# Altium PCB CPU.PcbDoc (part 1 of 2)
Units mm, origin at the board's own origin, x right, y up, seen from the top; angles counter-clockwise.
Board outline 46.9 x 22.5 mm, 2 copper layers (Top Layer, Bottom Layer), stack 0.904 mm thick; 53 components, 92 nets, 333 pads, 142 vias.
Unrouted connection lines stored in the file: 2.
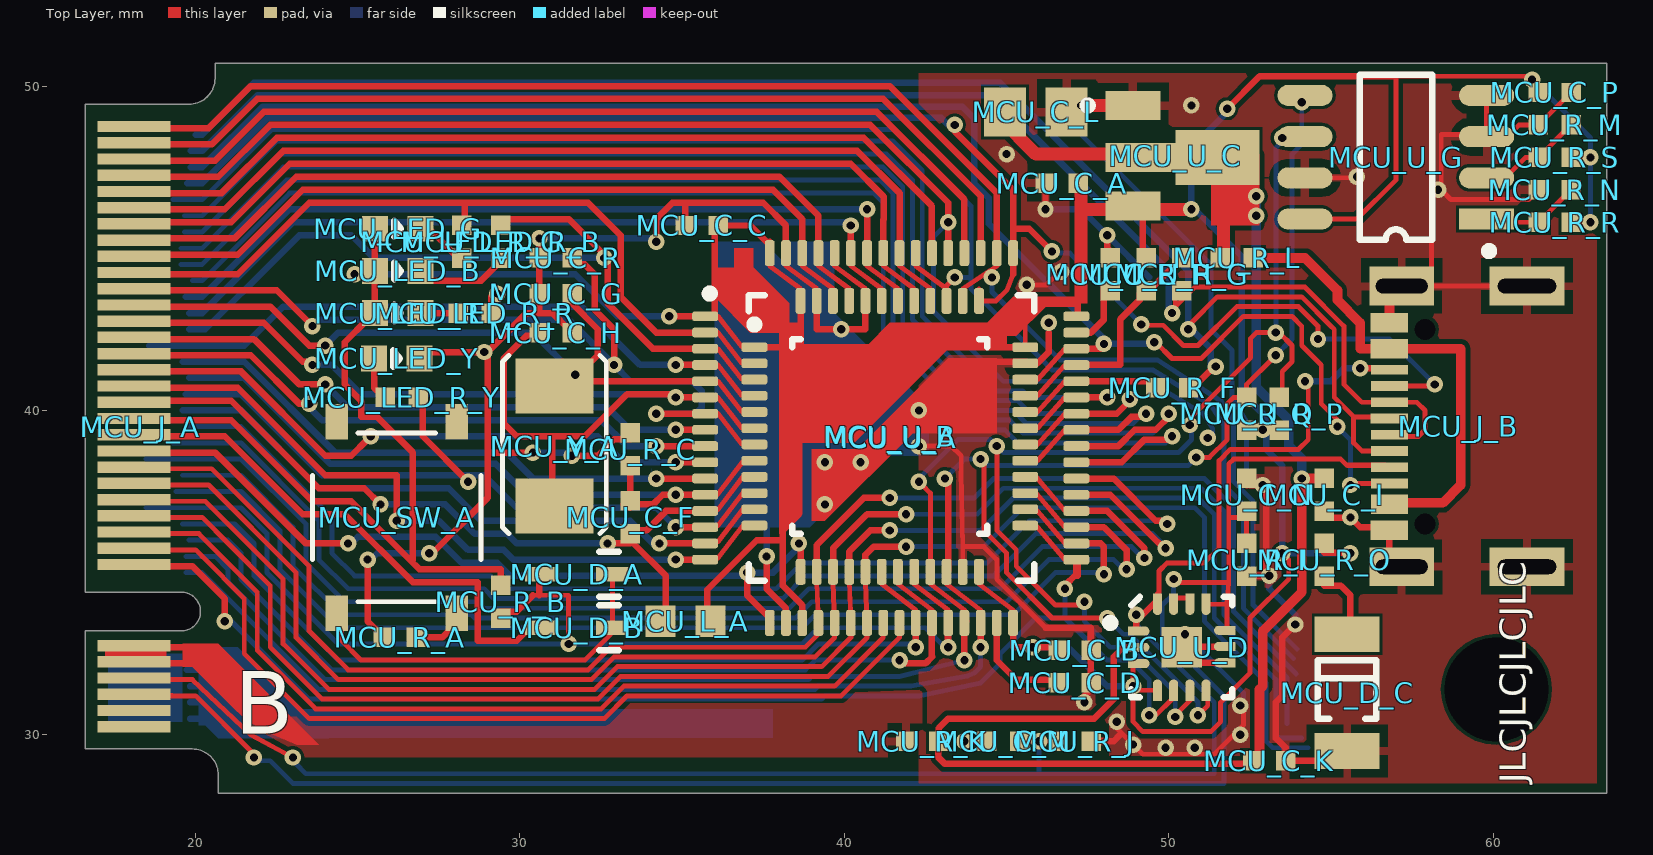
[diagram p0: Top Layer view]
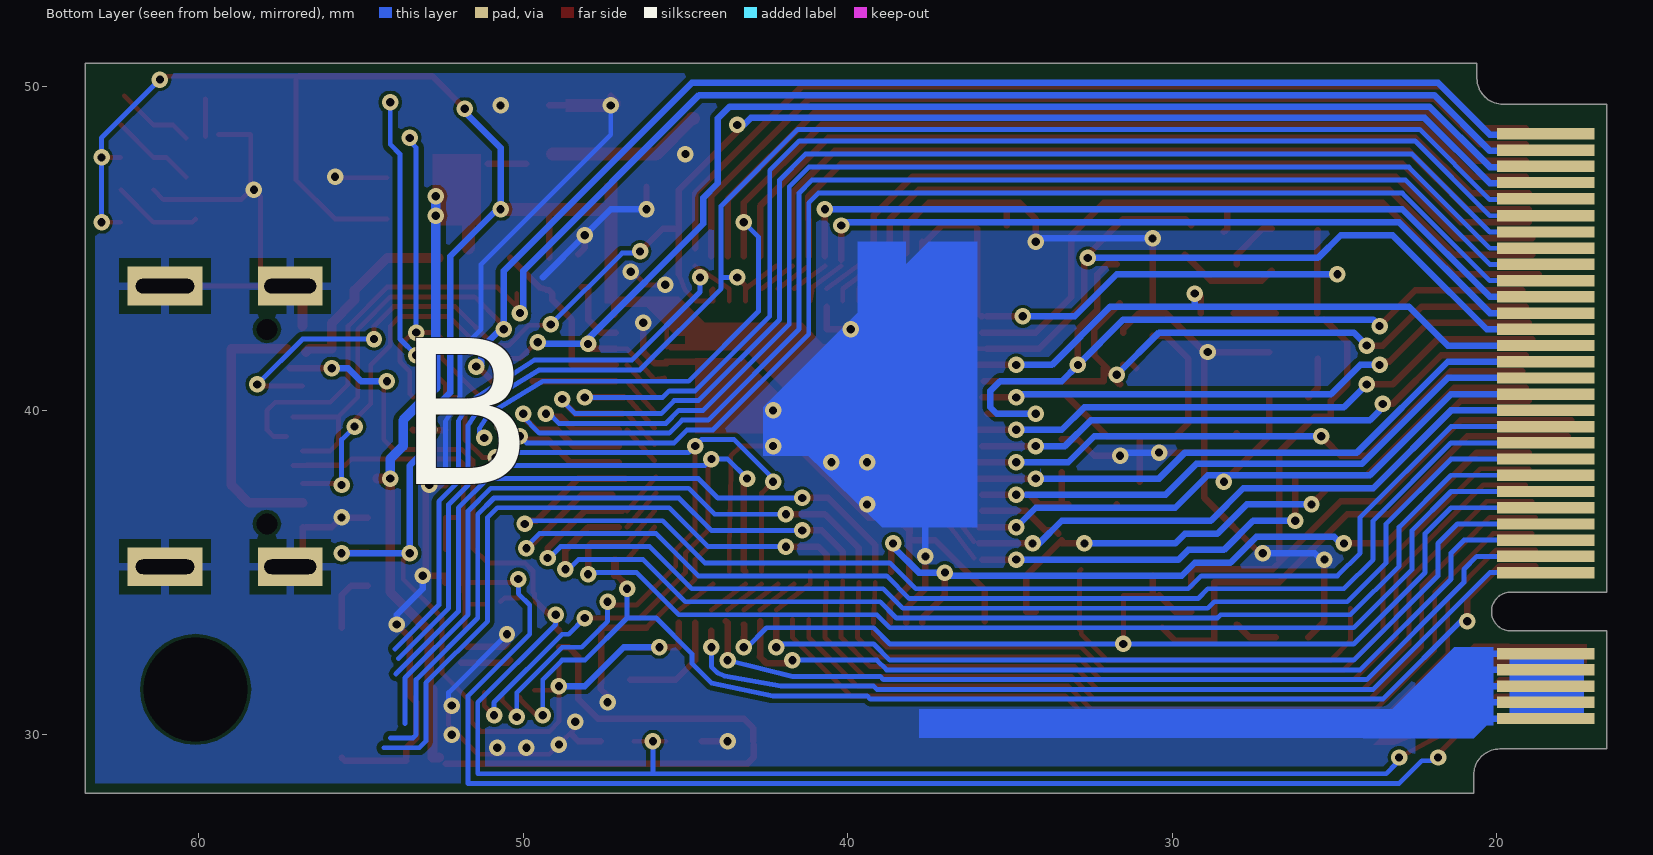
[diagram p1: Bottom Layer view, seen from below]
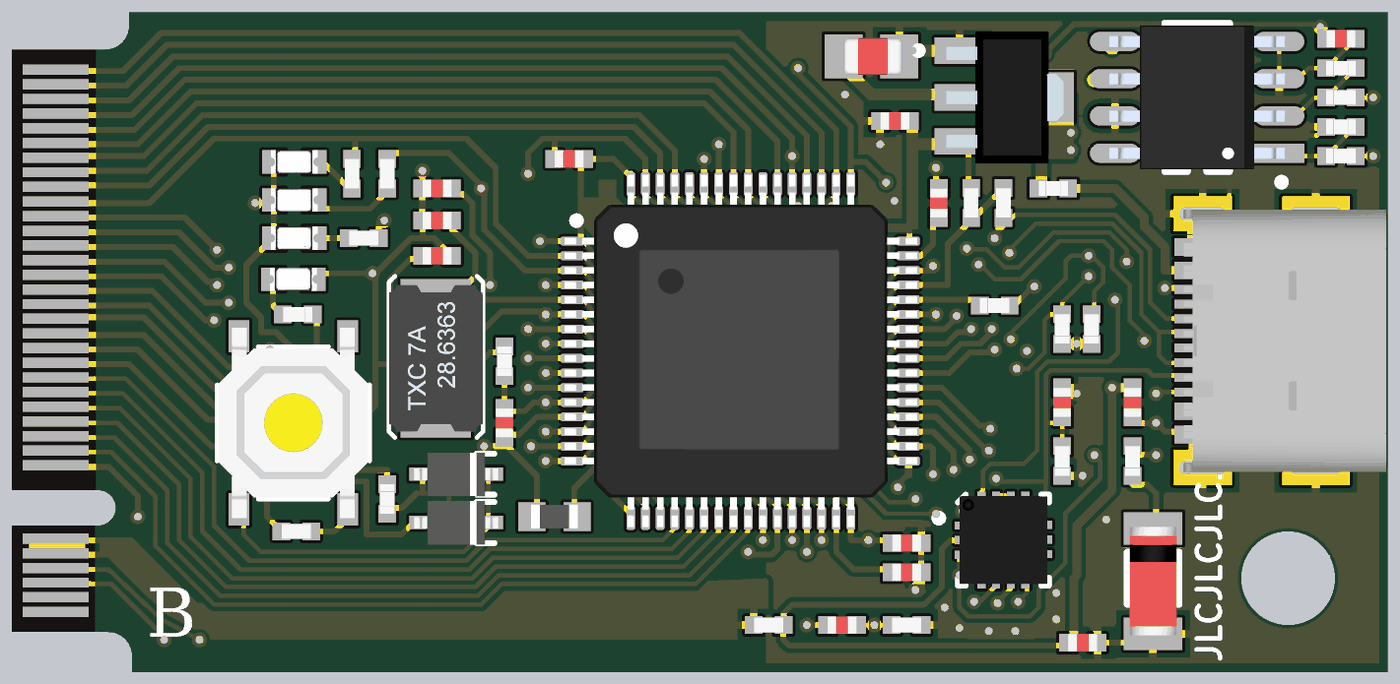
[diagram p3: 3D render of the assembled board from above, using the file's embedded part models]

## Layer stack, top to bottom
Top Solder: solder mask 0.0102, Solder Resist, Dk 3.5
Top Layer: signal copper 0.127
Dielectric 1: core 0.65, FR-4, Dk 4.2
Bottom Layer: signal copper 0.127
Bottom Solder: solder mask 0.0102, Solder Resist, Dk 3.5

## Board outline
16.6,29.563 16.6,33.2 19.55,33.2 ccw(c19.55,33.8) 19.55,34.4 16.6,34.4 16.6,49.437 19.79,49.437 ccw(c19.793,50.243) 20.6,50.24 20.6,50.7 63.5,50.7 63.5,28.2 20.7,28.2 20.7,28.763 ccw(c19.9,28.763) 19.9,29.563

## Design rules (kind name [scope] priority, off if disabled: settings)
Clearance [All] p1: gap=0.1 ignorepadtopadclearanceinfootprint=FALSE except(0: Arc-Hole Track-Hole SMDPad-Hole THPad-Hole Via-Hole Fill-Hole Poly-Hole Region-Hole Text-Hole; 0.15: Arc-Fill Arc-Poly Arc-Region Track-Fill Track-Poly Track-Region Fill-Fill Fill-Poly Fill-Region Poly-Poly Poly-Region Region-Region)
DiffPairsRouting [All] p1: maxlimit=0.254 minlimit=0.254 mostfreqgap=0.254 toplayer_minwidth=0.381 toplayer_maxwidth=1 toplayer_prefwidth=0.381 bottomlayer_minwidth=0.381 bottomlayer_maxwidth=1 bottomlayer_prefwidth=0.381 maxuncoupledlength=12.7
HoleSize [All] p1: absolutevalues=TRUE maxlimit=4 minlimit=0.025 maxpercent=80.000 minpercent=20.000
MinimumSolderMaskSliver [All] p1: minsoldermaskwidth=0
PolygonConnect [All] p1: thpad.connectstyle=Relief thpad.reliefconductorwidth=0.254 thpad.reliefentries=4 thpad.polygonreliefangle="90 Angle" thpad.airgapwidth=0.254 smdpad.connectstyle=Relief smdpad.reliefconductorwidth=0.254 smdpad.reliefentries=4 smdpad.polygonreliefangle="90 Angle" smdpad.airgapwidth=0.254 via.connectstyle=Direct via.reliefconductorwidth=0.254 via.reliefentries=4 via.polygonreliefangle="90 Angle" via.airgapwidth=0.254
RoutingVias [All] p1: holewidth=0.711 width=1.27 viastyle="Through Hole" minholewidth=0.711 minwidth=1.27 maxholewidth=0.711 maxwidth=1.27
SilkToSolderMaskClearance [IsPad] p1: minsilkscreentomaskgap=0 clearancetoexposedcopper=TRUE
SolderMaskExpansion [All] p1: expansion=0.102
Width [All] p1: maxlimit=1 minlimit=0.15 preferedwidth=0.2 minimp=50.000000 maximp=50.000000 favimp=50.000000
26 further rules are at their usual default settings.

## Classes and differential pairs
component class AFE: D3

## Components (designator, comment, footprint, x,y, rotation, side; value= is the part's Value field where it differs from the comment)
MCU_C_A "CL05A106MQ5NUNC" C_0402 46.7,47 r180 top value=10uF
MCU_C_B "CL05A106MQ5NUNC" C_0402 47.1,32.6 r0 top value=10uF
MCU_C_C "CL05A106MQ5NUNC" C_0402 35.6,45.7 r180 top value=10uF
MCU_C_D "CL05A106MQ5NUNC" C_0402 47.1,31.6 r0 top value=10uF
MCU_C_E "CL05A106MQ5NUNC" C_0402 48.2,44.2 r90 top value=10uF
MCU_C_F "CL05A105KA5NQNC" C_0402 33.4,36.7 r270 top value=1uF
MCU_C_G "0402CG120J500NT" C_0402 31.1,43.6 r0 top value=12pF
MCU_C_H "0402CG120J500NT" C_0402 31.1,42.4 r180 top value=12pF
MCU_C_I "CL05A106MQ5NUNC" C_0402 54.8,37.4 r270 top value=10uF
MCU_C_K "CL05A106MQ5NUNC" C_0402 53.1,29.2 r0 top value=10uF
MCU_C_L "CL21A106KAYNNNE" C_0805 45.9,49.2 r180 top value=10uF
MCU_C_M "CL05B104KO5NNNC" C_0402 44.9,29.8 r180 top value=100nF
MCU_C_N "CL05B104KO5NNNC" C_0402 52.4,37.4 r90 top value=100nF
MCU_C_P "CL05A106MQ5NUNC" C_0402 61.9,49.8 r180 top value=10uF
MCU_C_R "0402CG101J500NT" C_0402 31.1,44.7 r0 top value=100pF
MCU_D_A "1N4148WS" SOD-323 31.75,34.95 r180 top
MCU_D_B "1N4148WS" SOD-323 31.75,33.3 r180 top
MCU_D_C "ZMM3V3-M" DO-213AA 55.5,31.3 r270 top
MCU_J_A "NGFF_MALE_B" NGFF_MALE_B 20.725,39.5 r270 top
MCU_J_B "918-418K2023S40001" 918-418K2023S40001 60.1,39.5 r90 top
MCU_L_A "SDFL1608S100KTF" L_0603 35.1,33.5 r0 top value=10uH
MCU_LED_B "19-217/BHC-ZL1M2RY/3T" D_0603 26.23,44.3 r180 top
MCU_LED_G "19-217/GHC-YR1S2/3T" D_0603 26.23,45.6 r180 top
MCU_LED_R "KT-0603R" D_0603 26.23,43 r180 top
MCU_LED_R_B "0402WGF2200TCE" R_0402 29.4,45.2 r270 top value=220R
MCU_LED_R_G "0402WGF3300TCE" R_0402 28.2,45.2 r270 top value=330R
MCU_LED_R_R "0402WGF3300TCE" R_0402 28.6,43 r180 top value=330R
MCU_LED_R_Y "0402WGF3300TCE" R_0402 26.35,40.4 r180 top value=330R
MCU_LED_Y "19-21UYC/S530-A4/TR8" D_0603 26.2,41.6 r180 top
MCU_R_A "0402WGF3300TCE" R_0402 26.3,33 r180 top value=330R
MCU_R_B "0402WGF4701TCE" R_0402 29.4,34.1 r270 top value=4.7k
MCU_R_C "0402WGF0000TCE" R_0402 33.4,38.8 r270 top value=0R
MCU_R_F "0402WGF220JTCE" R_0402 50.1,40.7 r180 top value=22R
MCU_R_G "0402WGF220JTCE" R_0402 50.4,44.2 r90 top value=22R
MCU_R_H "0402WGF1501TCE" R_0402 49.3,44.2 r90 top value=1.5k
MCU_R_I "0402WGF5101TCE" R_0402 52.4,35.4 r270 top value=5.1k
MCU_R_J "0402WGF5101TCE" R_0402 47.1,29.8 r0 top value=5.1k
MCU_R_K "0402WGF0000TCE" R_0402 42.4,29.8 r0 top value=0R
MCU_R_L "0402WGF0000TCE" R_0402 52.1,44.7 r0 top value=0R
MCU_R_M "0402WGF0000TCE" R_0402 61.9,48.8 r180 top value=0R
MCU_R_N "0402WGF0000TCE" R_0402 61.9,46.8 r180 top value=0R
MCU_R_O "0402WGF0000TCE" R_0402 54.8,35.4 r90 top value=0R
MCU_R_P "0402WGF5101TCE" R_0402 53.4,39.9 r270 top value=5.1k
MCU_R_Q "0402WGF5101TCE" R_0402 52.4,39.9 r270 top value=5.1k
MCU_R_R "0402WGF1002TCE" R_0402 61.9,45.8 r0 top value=10k
MCU_R_S "0402WGF1002TCE" R_0402 61.9,47.8 r0 top value=10k
MCU_SW_A "TS-1187A-B-A-B" TS-1187A-C-C-B 26.2,36.7 r270 top
MCU_U_A "STM32F405RGT6" QFP-64-P0.5MM 41.45,39.15 r0 top
MCU_U_B "GD32F103CBT6" QFP-48-P0.5MM 41.4,39.2 r0 top
MCU_U_C "HT7533-1" SOT-223-3 50.7,47.8 r0 top
MCU_U_D "FUSB302BMPX" QFN-14-P0.5MM 50.4,32.7 r0 top
MCU_U_G "24LC256T-I/SN" SOIC-8-P1.27-W3.5 57,47.8 r180 top
MCU_Y_A "X50328MSB2GI" YSX530GA 31.06,38.9 r270 top value=8MHz

## Footprints (in the part's own frame and the unit in brackets; to place one, negate y for a bottom-side part, rotate by r counter-clockwise, add the part's x,y. Pads: shape width x height; smd on the part's side, far side on the other; paste and mask are expansions set on the pad)
918-418K2023S40001 [mm] "USB-C (USB TYPE-C) USB 2.0 Receptacle Connector 24 (16+8 Dummy) Position Surface Mount, Right Angle"
  rect 1.2x2.3 hole 0.45 slot 1.8 at 90 deg: 0(-4.32,-0.943) 0(4.33,-0.943)
  rect 1.2x2 hole 0.45 slot 1.6 at 90 deg: 0(-4.32,2.917) 0(4.33,2.917)
  rect 0.6x1.15 smd: A1_B12(-3.2,3.3) A4_B9(-2.4,3.297) A9_B4(2.4,3.3) A12_B1(3.2,3.3)
  rect 0.3x1.15 smd: A5(-1.25,3.297) A6(-0.25,3.297) A7(0.25,3.3) A8(1.25,3.297) B5(1.75,3.297) B6(0.75,3.297) B7(-0.75,3.297) B8(-1.75,3.297)
  round 0 hole 0.65 unplated: M(-3,2.2) M(3,2.2)
  body extent -4.47,-3.35 4.47,3.55, height 3.18
C_0402 [mm] "Chip Capacitor; Body 1.0 x 0.5 mm (LxW typ)"
  rect 0.6x0.6 smd: 1(-0.508,0) 2(0.508,0)
  body extent -0.5,-0.3 0.5,0.3, height 0.2
C_0805 [mm] "Chip Capacitor; Body 2.0 x 1.2 mm (LxW typ)"
  rect 1.3x1.5 smd: 1(-0.95,0) 2(0.95,0)
  body extent -1.05,-0.62 0.95,0.62, height 0.78
D_0603 [mm] "Chip Diode; Body 1.6 x 0.8 mm (LxW typ)"
  rect 0.8x0.8 smd: 1(-0.7,0) 2(0.7,0)
  silkscreen extent -0.1,-0.25 0.1,0.25, body extent -0.8,-0.4 0.8,0.4, height 0.35
DO-213AA [mm] "2 Leads"
  rect 1.1x2 smd: 1(-1.8,0) 2(1.8,0)
  silkscreen extent -1,-0.9 0.8,0.9, body extent -1.85,-0.8 1.85,0.8, height 1.61
L_0603 [mm]
  rect 0.93x0.98 smd: 1(-0.77,0) 2(0.77,0)
  body extent -0.82,-0.41 0.83,0.41, height 0.46
NGFF_MALE_B [mm] "NGFF B Key, Male"
  rect 0.35x2.25 smd: 1(9.25,-2.625) 3(8.75,-2.625) 5(8.25,-2.625) 7(7.75,-2.625) 9(7.25,-2.625) 11(6.75,-2.625) 21(4.25,-2.625) 23(3.75,-2.625) 25(3.25,-2.625) 27(2.75,-2.625) 29(2.25,-2.625) 31(1.75,-2.625) 33(1.25,-2.625) 35(0.75,-2.625) 37(0.25,-2.625) 39(-0.25,-2.625) 41(-0.75,-2.625) 43(-1.25,-2.625) 45(-1.75,-2.625) 47(-2.25,-2.625) 49(-2.75,-2.625) 51(-3.25,-2.625) 53(-3.75,-2.625) 55(-4.25,-2.625) 57(-4.75,-2.625) 59(-5.25,-2.625) 61(-5.75,-2.625) 63(-6.25,-2.625) 65(-6.75,-2.625) 67(-7.25,-2.625) 69(-7.75,-2.625) 71(-8.25,-2.625) 73(-8.75,-2.625) 75(-9.25,-2.625)
  rect 0.35x3 smd far side: 2(9,-2.25) 4(8.5,-2.25) 6(8,-2.25) 8(7.5,-2.25) 10(7,-2.25) 20(4.5,-2.25) 22(4,-2.25) 24(3.5,-2.25) 26(3,-2.25) 28(2.5,-2.25) 30(2,-2.25) 32(1.5,-2.25) 34(1,-2.25) 36(0.5,-2.25) 38(0,-2.25) 40(-0.5,-2.25) 42(-1,-2.25) 44(-1.5,-2.25) 46(-2,-2.25) 48(-2.5,-2.25) 50(-3,-2.25) 52(-3.5,-2.25) 54(-4,-2.25) 56(-4.5,-2.25) 58(-5,-2.25) 60(-5.5,-2.25) 62(-6,-2.25) 64(-6.5,-2.25) 66(-7.025,-2.25) 68(-7.525,-2.25) 70(-8.025,-2.25) 72(-8.525,-2.25) 74(-9.025,-2.25)
QFN-14-P0.5MM [mm] "Quad Flat No Lead, Plastic; 14 Terminals; Body 2.5 x 2.5 mm; Pitch 0.5 mm"
  rect 1.25x1.25 smd: 0(0,0)
  rect 0.28x0.28 smd: 1(-1.515,0.496) 2(-1.515,-0.004) 3(-1.515,-0.504) 4(-0.75,-1.515) 5(-0.25,-1.515) 6(0.25,-1.515) 7(0.75,-1.515) 8(1.515,-0.479) 9(1.515,0.021) 10(1.515,0.521) 11(0.75,1.515) 12(0.25,1.515) 13(-0.25,1.515) 14(-0.75,1.515)
  oval 0.66x0.28 smd: 1(-1.325,0.496) 2(-1.325,-0.004) 3(-1.325,-0.504) 8(1.325,-0.479) 9(1.325,0.021) 10(1.325,0.521)
  oval 0.28x0.66 smd: 4(-0.75,-1.325) 5(-0.25,-1.325) 6(0.25,-1.325) 7(0.75,-1.325) 11(0.75,1.325) 12(0.25,1.325) 13(-0.25,1.325) 14(-0.75,1.325)
  silkscreen extent -2.33,-1.55 1.55,1.55, body extent -1.5,-1.5 1.5,1.5, height 0.81
QFP-48-P0.5MM [mm] "QFP; 48 Leads; Body 7 x 7 mm; Pitch 0.5 mm"
  rrect50% 0.8x0.3 smd: 1(-4.175,2.75) 2(-4.175,2.25) 3(-4.175,1.75) 4(-4.175,1.25) 5(-4.175,0.75) 6(-4.175,0.25) 7(-4.175,-0.25) 8(-4.175,-0.75) 9(-4.175,-1.25) 10(-4.175,-1.75) 11(-4.175,-2.25) 12(-4.175,-2.75) 25(4.175,-2.75) 26(4.175,-2.25) 27(4.175,-1.75) 28(4.175,-1.25) 29(4.175,-0.75) 30(4.175,-0.25) 31(4.175,0.25) 32(4.175,0.75) 33(4.175,1.25) 34(4.175,1.75) 35(4.175,2.25) 36(4.175,2.75)
  rrect50% 0.3x0.8 smd: 13(-2.75,-4.175) 14(-2.25,-4.175) 15(-1.75,-4.175) 16(-1.25,-4.175) 17(-0.75,-4.175) 18(-0.25,-4.175) 19(0.25,-4.175) 20(0.75,-4.175) 21(1.25,-4.175) 22(1.75,-4.175) 23(2.25,-4.175) 24(2.75,-4.175) 37(2.75,4.175) 38(2.25,4.175) 39(1.75,4.175) 40(1.25,4.175) 41(0.75,4.175) 42(0.25,4.175) 43(-0.25,4.175) 44(-0.75,4.175) 45(-1.25,4.175) 46(-1.75,4.175) 47(-2.25,4.175) 48(-2.75,4.175)
  silkscreen extent -4.3,-3 3,3.57, body extent -4.5,-4.5 4.5,4.5, height 1.6
QFP-64-P0.5MM [mm] "64-Pin Plastic Quad Flat Pack (TQFP)"
  rrect50% 0.8x0.3 smd: 1(-5.742,3.75) 2(-5.742,3.25) 3(-5.742,2.75) 4(-5.742,2.25) 5(-5.742,1.75) 6(-5.742,1.25) 7(-5.742,0.75) 8(-5.742,0.25) 9(-5.742,-0.25) 10(-5.742,-0.75) 11(-5.742,-1.25) 12(-5.742,-1.75) 13(-5.742,-2.25) 14(-5.742,-2.75) 15(-5.742,-3.25) 16(-5.742,-3.75) 33(5.7,-3.75) 34(5.7,-3.25) 35(5.7,-2.75) 36(5.7,-2.25) 37(5.7,-1.75) 38(5.7,-1.25) 39(5.7,-0.75) 40(5.7,-0.25) 41(5.7,0.25) 42(5.7,0.75) 43(5.7,1.25) 44(5.7,1.75) 45(5.7,2.25) 46(5.7,2.75) 47(5.7,3.25) 48(5.7,3.75)
  rrect50% 0.3x0.8 smd: 17(-3.75,-5.7) 18(-3.25,-5.7) 19(-2.75,-5.7) 20(-2.25,-5.7) 21(-1.75,-5.7) 22(-1.25,-5.7) 23(-0.75,-5.7) 24(-0.25,-5.7) 25(0.25,-5.7) 26(0.75,-5.7) 27(1.25,-5.7) 28(1.75,-5.7) 29(2.25,-5.7) 30(2.75,-5.7) 31(3.25,-5.7) 32(3.75,-5.7) 49(3.75,5.7) 50(3.25,5.7) 51(2.75,5.7) 52(2.25,5.7) 53(1.75,5.7) 54(1.25,5.7) 55(0.75,5.7) 56(0.25,5.7) 57(-0.25,5.7) 58(-0.75,5.7) 59(-1.25,5.7) 60(-1.75,5.7) 61(-2.25,5.7) 62(-2.75,5.7) 63(-3.25,5.7) 64(-3.75,5.7)
  silkscreen extent -5.72,-4.4 4.4,4.57, body extent -6.01,-6.01 6.01,6.01, height 1.55
R_0402 [mm] "Body 1.0 x 0.5 mm (LxW typ)"
  rect 0.6x0.6 smd: 1(-0.508,0) 2(0.508,0)
  body extent -0.5,-0.25 0.5,0.25, height 0.35
SOD-323 [mm] "SOD-323/SC-76; 2 Leads; Body 1.7 x 1.3 mm, (LxW)"
  rect 1x0.45 smd: 1(-1.1,0) 2(1.1,0)
  silkscreen extent -1.3,-0.7 -0.7,0.7, body extent -1.43,-0.74 1.43,0.76, height 1.12
SOIC-8-P1.27-W3.5 [mm]
  rect 1.7x0.65 smd: 1(-2.8,1.9)
  oval 1.7x0.65 smd: 2(-2.8,0.63) 3(-2.8,-0.64) 4(-2.8,-1.91) 5(2.8,-1.91) 6(2.8,-0.64) 7(2.8,0.63) 8(2.8,1.9)
  silkscreen extent -3,-2.55 1.12,3.01, body extent -3,-2.45 3,2.45, height 1.5
SOT-223-3 [mm] "SOT223, 4-Leads, Body IPC High Density"
  rect 1.7x0.9 smd: 1(-1.8,1.6) 3(-1.8,-1.5)
  rect 2.5x0.9 smd: 2(-1.4,0)
  rect 2.6x1.7 smd: 2(0.8,0)
  silkscreen extent -3.32,1.48 -3.08,1.72, body extent -2.25,-2.25 1.75,2.25, height 1.5
TS-1187A-C-C-B [mm] "Tactile Switch SPST-NO Top Actuated Surface Mount"
  rect 1.1x0.7 smd: 1(-2.95,1.85) 1(2.95,1.85) 2(-2.95,-1.85) 2(2.95,-1.85)
  silkscreen extent -2.6,-2.6 2.6,2.6, body extent -3.25,-2.54 3.25,2.54, height 1.52
YSX530GA [mm]
  rect 1.7x2.4 smd: 1(-1.85,0) 2(1.85,0)
  silkscreen extent -2.8,-1.6 2.7,1.6, body extent -2.5,-1.6 2.5,1.6, height 1.2

## Part data
MCU_C_A MCU_C_B MCU_C_C MCU_C_D MCU_C_E MCU_C_I MCU_C_K MCU_C_P: "C - CAPACITOR - MLCC - 10uF - 6.3V - 0402", JLC Availability=Basic, LCSC Part #=C15525, WVDC=6.3
MCU_C_F: "C - CAPACITOR - MLCC - 1uF - 25V - 0402", JLC Availability=Basic, LCSC Part #=C52923, WVDC=16
MCU_C_G MCU_C_H: "C - CAPACITOR - MLCC - 12pF - 50V - 0402", JLC Availability=Basic, LCSC Part #=C1547, WVDC=50
MCU_C_L: "C - CAPACITOR - MLCC - 10uF - 25V - 0805", LCSC Part #=C15850, Availability=Basic, WVDC=25
MCU_C_M MCU_C_N: "C - CAPACITOR - MLCC - 100nF - 16V - 0402", JLC Availability=Basic, LCSC Part #=C1525, WVDC=16
MCU_C_R: "C - CAPACITOR - MLCC - 100pF - 50V - 0402", JLC Availability=Extended, LCSC Part #=C1546
MCU_D_A MCU_D_B: "D - DIODE - FAST TRR - 100V - 150mA - 4ns", JLC Availability=Basic, LCSC Part #=C2128, If=150mA, PIV=100V, Trr=4ns
MCU_D_C: "D - DIODE - ZENER - 3.3V - 500mW", JLC Availability=Basic, LCSC Part #=C8056
MCU_J_A: "J - JACK - NGFF Male Finger, B Key", Manufacturer=Kyocera, Manufacturer P/N=245863050024829
MCU_J_B: "J - JACK - USB - Type C - Recepticle - SMT - 90°", JLC Availability=LCSC, LCSC Part #=C167321
MCU_L_A: "L - INDUCTOR - 10uH - 0603", JLC Availability=Basic, LCSC Part #=C1035
MCU_LED_B: "D - LED - 0603 - Blue", JLC Availability=Basic, LCSC Part #=C72041
MCU_LED_G: "D - LED - 0603 - Green", JLC Availability=Basic, LCSC Part #=C72043
MCU_LED_R: "D - LED - 0603 - Red", JLC Availability=Basic, LCSC Part #=C2286
MCU_LED_R_B: "R - RESISTOR - SMD - 220R - 1% - 0402", JLC Availability=Basic, LCSC Part #=C25091
MCU_LED_R_G MCU_LED_R_R MCU_LED_R_Y MCU_R_A: "R - RESISTOR - SMD - 330R - 1% - 0402", JLC Availability=Basic, LCSC Part #=C25104
MCU_LED_Y: "D - LED - 0603 - Yellow (Sodium)", JLC Availability=Extended, LCSC Part #=C409441
MCU_R_B: "R - RESISTOR - SMD - 4.7k - 1% - 0402", JLC Availability=Basic, LCSC Part #=C25900
MCU_R_C MCU_R_K MCU_R_L MCU_R_M MCU_R_N MCU_R_O: "R - RESISTOR - SMD - 0R - 1% - 0402", JLC Availability=Basic, LCSC Part #=C17168
MCU_R_F MCU_R_G: "R - RESISTOR - SMD - 22R - 1% - 0402", JLC Availability=Basic, LCSC Part #=C25092
MCU_R_H: "R - RESISTOR - SMD - 1.5k - 1% - 0402", JLC Availability=Basic, LCSC Part #=C25867
MCU_R_I MCU_R_J MCU_R_P MCU_R_Q: "R - RESISTOR - SMD - 5.1k - 1% - 0402", JLC Availability=Basic, LCSC Part #=C25905
MCU_R_R MCU_R_S: "R - RESISTOR - SMD - 10k - 1% - 0402", JLC Availability=Basic, LCSC Part #=C25744
MCU_SW_A: "SW - SWITCH - SPST - NO - Top Actuated Surface Mount", JLC Availability=Basic, LCSC Part #=C318884
MCU_U_A: "U - IC - MCU 32BIT 1MB FLASH 64LQFP", JLC Availability=Extended, LCSC Part #=C15742, ComponentLink1Description=Upverter, ComponentLink1URL=https://upverter.com/upn/revision/179c87d5c3d4f257/, ComponentLink2Description=Datasheet, ComponentLink2URL=http://www.st.com/content/ccc/resource/technical/document/datasheet/33/d4/6f/1d/df/0b/4c/6d/CD00161566.pdf/files/CD00161566.pdf/jcr:content/translations/en.CD00161566.pdf
MCU_U_B: "U - IC - MCU, 128 KB Flash, 20 KB Internal RAM, 37 I/Os, 48-pin LQFP, -40 to 85 degC", I/Os (High Current)=37, JLC Availability=Extended, LCSC Part #=C77979, Operating Frequency(F) (Processor speed) (MHz)=72, ComponentLink1Description="Manufacturer URL", ComponentLink1URL=http://www.st.com/web/en/home.html, ComponentLink2Description=Datasheet, ComponentLink2URL=http://www.st.com/st-web-ui/static/active/en/resource/technical/document/datasheet/CD00161566.pdf, ComponentLink3Description="Package Specification", ComponentLink3URL=http://www.st.com/st-web-ui/static/active/en/resource/technical/document/datasheet/DM00058181.pdf, FLASH Size (Prog) (kB)=128, Internal RAM Size (kB)=20
MCU_U_C: "U - IC - 3V3 Power Regulator", JLC Availability=Basic, LCSC Part #=C14289, VOut=3.3
MCU_U_D: "U - IC - USB PD PHY", JLC Availability=Extended, LCSC Part #=C442699
MCU_U_G: "U - IC - EEPROM 256k", JLC Availability=Extended, LCSC Part #=C5458, Storage=256k
MCU_Y_A: "Y - RESONATOR - 8MHZ ±10PPM - SMD-5032", LCSC Part #=C115962, Availability=Basic

## Free pads (board coordinates)
  round 0 hole 3.2 unplated: 11(60.1,31.4)

## Via types
v1: diameter 0.508, hole 0.254, Top Layer to Bottom Layer, tented both sides, 142 vias

## Nets (pads, with @x,y where several pads share a name; then routed paths per layer and width w, separated by ;. In a path a pad name is that pad's centre, name@x,y a point inside that pad or via, vN(x,y) a via of type N, cw(c..) or ccw(c..) an arc to the next point about the centre after c; other vN are vias at no path point)
3V3: 
5V: 
CHA_GND: 
CHA_V_BUFF: 
CHA_V_DIV: 
CHA_VB: 
CHA_VCC: 
CHA_VIN: 
CHA_VIN_B: 
CHA_VM: 
CHA_VS: 
CHA_VSSA: 
CPU_5_V_SW: MCU_J_A.9 MCU_J_A.11 MCU_R_K.1 | length 3
  Top Layer w0.2: MCU_J_A.9@18.7,32.2 20.203,32.2 ; MCU_J_A.11@18.7,32.7 20.203,32.7
GND: 
MCU_3V3: MCU_C_A.1 MCU_C_B.1 MCU_C_C.1 MCU_C_P.2 MCU_J_A.39 MCU_L_A.2 MCU_LED_B.2 MCU_LED_G.2 MCU_LED_R.2 MCU_R_B.1 MCU_R_H.2 MCU_R_O.2 MCU_R_P.2 MCU_R_Q.2 MCU_R_R.2 MCU_R_S.2 MCU_U_A.1 MCU_U_A.19 MCU_U_A.32 MCU_U_A.48 MCU_U_A.64 MCU_U_B.1 MCU_U_B.24 MCU_U_B.36 MCU_U_B.48 MCU_U_C.3 MCU_U_D.3 MCU_U_D.4 MCU_U_G.8 | length 137.8
  Top Layer w0.15: MCU_U_A.1@36.1,42.9 MCU_U_B.1@36.85,41.95 ; MCU_U_B.1@36.851,41.956 MCU_U_B.1@36.9,41.95 ; MCU_U_A.64@37.7,44.45 MCU_U_B.48@38.65,43.75 ; MCU_U_B.24@44.15,34.65 MCU_U_A.32@45.2,33.85 ; MCU_U_B.36@45.575,41.95 45.575,42.675 ; MCU_U_D.3@48.9,32.2 v1(48.9,31.5) v1@48.9,31.4 ; MCU_U_D.4@49.65,31.375 48.925,31.375 v1@48.9,31.4 ; v1(53.5,35.6) 53.7,35.4 53.7,34.8 52.5,33.6 52.5,31.9 51.6,31 51.6,30.4 51.3,30.1 50.7,30.1 49.2,30.1 48.9,30.4 v1@48.9,31.4 ; MCU_U_G.8@54.2,45.9 55.8,45.9 57,47.1 57,50.3 ; 56.9,50.3 57,50.3 ; v1(61.2,50.2) 61.1,50.3 57,50.3 ; MCU_R_R.2@62.408,45.8 v1(63,45.8) ; MCU_R_S.2@62.408,47.8 v1(63,47.8)
  Top Layer w0.2: MCU_J_A.39@17.7,39.7 21.1,39.7 23.6,37.2 24.8,37.2 26.6,35.4 ; v1(24.9,44.2) MCU_LED_B.2@25.4,44.2 ; MCU_LED_R.2@25.3,42.8 24.6,42.1 24.6,40.8 25.1,40.3 25.1,39.8 25.6,39.8 26.7,38.7 26.7,35.4 26.6,35.4 ; MCU_LED_G.2@25.5,45.55 25.53,45.52 MCU_LED_B.2@25.53,44.3 MCU_LED_R.2@25.53,43 ; MCU_R_B.1@29.4,34.6 MCU_R_B.1@29.4,34.608 29.4,35.1 26.9,35.1 26.6,35.4 ; v1(34.6,42.9) MCU_U_A.1@35.708,42.9 ; MCU_L_A.2@35.77,33.5 35.77,34.47 37.3,36 38.1,36 ; MCU_U_A.1@35.85,42.9 MCU_U_A.1@35.881,42.9 ; MCU_U_A.1@36,43 MCU_C_C.1@36,45.6 ; MCU_C_C.1@36.1,45.7 MCU_C_C.1@36.108,45.7 37.1,45.7 MCU_U_A.64@37.7,45.1 ; MCU_U_B.1@37.225,41.95 38.6,41.95 ; MCU_U_A.64@37.7,44.75 MCU_U_A.64@37.7,44.85 MCU_U_A.64@37.7,45.1 ; MCU_U_A.64@37.7,45.2 MCU_U_A.64@37.7,45.1 ; 38.2,36.6 38.2,36.4 ; 38.6,42 38.6,41.95 ; 38.65,42 MCU_U_B.48@38.65,43.375 ; MCU_U_A.19@38.7,33.45 38.7,33.55 38.7,34 38.1,34.6 38.1,36 ; MCU_U_A.32@45.2,33.45 45.2,32.7 v1(45.8,32.7) MCU_C_B.1@46.5,32.7 ; MCU_U_B.36@45.45,41.95 38.6,41.95 ; MCU_U_A.48@47.2,42.95 47.2,47 MCU_C_A.1@47.208,47 ; 47.3,46.2 49.8,46.2 ; MCU_R_H.2@49.2,44.708 MCU_U_C.3@49.2,46.1 ; MCU_U_C.3@49.7,46.3 49.8,46.2 ; v1(50.7,46.2) 49.8,46.2 ; v1(51.8,49.3) 52.8,50.3 56.9,50.3 ; MCU_R_Q.2@52.4,39.392 53.392,39.392 MCU_R_P.2@53.4,39.4 ; 54.8,35.608 55.508,35.608 v1@55.6,35.7 ; 38.1,36 38.1,36.3 38.2,36.4 ; 38.2,36.4 38.6,36.8 38.6,41.95
  Bottom Layer w0.15: v1(61.2,50.2) 63,48.4 v1(63,47.8) ; v1(63,45.8) v1@63,47.7
  Bottom Layer w0.2: v1(24.9,44.2) 31.7,44.2 33,42.9 v1(34.6,42.9) ; v1(45.8,32.7) 46.9,32.7 48.1,31.5 v1(48.9,31.5) ; v1(50.7,46.2) 50.8,46.2 52.25,44.75 52.25,40.55 53,39.8 53,38.8 53.5,38.3 v1(53.5,35.6) v1(55.6,35.6) ; v1@50.7,46.4 50.7,48.1 51.9,49.3 v1(51.8,49.3)
  other v1: 52.9,39.4
MCU_5V: MCU_C_I.1 MCU_C_K.1 MCU_C_L.2 MCU_R_K.2 MCU_R_L.1 MCU_U_C.2 MCU_U_D.2 | length 45.5
  Top Layer w0.2: MCU_R_K.2@42.9,29.7 42.9,29.3 43.1,29.1 MCU_C_K.1@52.392,29.1 ; MCU_R_K.2@42.908,29.8 42.908,30.208 43.2,30.5 47.7,30.5 48.3,31.1 48.3,32.4 48.596,32.696 MCU_U_D.2@48.885,32.696 ; MCU_U_C.2@49.9,47.6 MCU_U_C.2@51.1,47.6
  Top Layer w0.3: MCU_C_K.1@52.592,29.3 52.8,29.3 52.8,31.4 52.9,31.5 52.9,33.2 54.1,34.4 v1(54.1,37.9) MCU_C_I.1@54.5,37.9
  Top Layer w0.4: MCU_C_L.2@44.75,49 44.8,49 45.9,47.9 MCU_U_C.2@49.1,47.9 ; 51.692,45 51.692,47.292 MCU_U_C.2@51.7,47.3
  Bottom Layer w0.3: v1(52.7,46.6) 52.7,40.7 53.7,39.7 53.7,38.9 54.1,38.5 v1(54.1,37.9)
  other v1: 52.7,46
MCU_A0: MCU_R_N.1 MCU_R_R.1 MCU_U_G.1 | length 2.8
  Top Layer w0.15: MCU_U_G.1@60.1,45.9 60.2,45.8 MCU_R_R.1@61.392,45.8 61.4,45.8 MCU_R_N.1@62.4,46.8
MCU_A1: MCU_R_M.1 MCU_R_S.1 MCU_U_G.2 | length 2.7
  Top Layer w0.15: MCU_U_G.2@60.4,47.2 61,47.8 MCU_R_S.1@61.392,47.8 61.4,47.8 MCU_R_M.1@62.4,48.8
MCU_BUTTON_OC: MCU_D_B.2 MCU_J_A.37 | length 16.3
  Top Layer w0.2: MCU_J_A.37@17.8,39.2 20.9,39.2 23.3,36.8 24.6,36.8 26.7,34.7 28.7,34.7 28.7,32.9 29.9,32.9 MCU_D_B.2@30.3,33.3
MCU_GND: MCU_C_A.2 MCU_C_B.2 MCU_C_C.2 MCU_C_D.2 MCU_C_E.2 MCU_C_G.1 MCU_C_H.1 MCU_C_I.2 MCU_C_K.2 MCU_C_L.1 MCU_C_M.2 MCU_C_N.2 MCU_C_P.1 MCU_C_R.1 MCU_D_C.2 MCU_J_A.2 MCU_J_A.4 MCU_J_A.6 MCU_J_A.8 MCU_J_A.10 MCU_J_B.0 MCU_J_B.A1_B12 MCU_J_B.A12_B1 MCU_LED_Y.1 MCU_R_A.2 MCU_R_C.1 MCU_R_I.2 MCU_R_J.2 MCU_R_M.2 MCU_R_N.2 MCU_U_A.18 MCU_U_A.60 MCU_U_A.63 MCU_U_B.23 MCU_U_B.35 MCU_U_B.44 MCU_U_B.47 MCU_U_C.1 MCU_U_D.0 MCU_U_D.8 MCU_U_D.9 MCU_U_G.3 MCU_U_G.4 MCU_U_G.7 | length 147.6
  Top Layer w0.15: MCU_U_A.63@38.2,44.45 MCU_U_B.47@39.15,43.75 ; MCU_U_A.60@39.7,44.45 MCU_U_B.44@40.65,43.75 ; v1(42.3,38.9) 43.3,38.9 43.602,38.598 43.602,38 ; 43.6,38.1 43.6,38.098 43.65,35.8 ; MCU_U_B.23@43.65,35.025 43.65,35.8 ; v1(45.619,43.871) 46.226,43.871 v1@46.713,44.358 ; 46.2,33.3 44.7,34.8 44.7,35.4 44.3,35.8 43.65,35.8 ; v1(48.4,30.4) 48.4,30.2 v1(48.9,29.7) 49.2,29.4 51.4,29.4 52.3,30.3 v1@52.3,30.9 ; MCU_U_G.7@54.2,47.17 v1@55.77,47.17 ; MCU_J_B.0@57,43.6 57.23,43.83 MCU_J_B.0@61.043,43.83 ; MCU_J_B.0@58.1,44.1 58.1,46.6 v1(58.3,46.8) ; MCU_U_G.3@59.4,48.5 58.4,48.5 58.4,46.8 58.7,46.5 61.092,46.5 MCU_R_N.2@61.392,46.8 ; MCU_U_G.3@59.8,48.44 MCU_U_G.4@59.8,49.6 ; MCU_U_G.3@60.4,48.4 60.8,48.8 MCU_R_M.2@61.392,48.8 61.4,48.8 MCU_C_P.1@62.3,49.7
  Top Layer w0.2: v1(25.3,35.4) 25.3,33.5 MCU_R_A.2@25.8,33 ; MCU_LED_Y.1@27,41.8 v1(28.9,41.8) ; v1@27.2,35.5 29,37.3 29,38.7 ; v1@30.5,38.7 v1(30.4,38.7) 29,38.7 ; MCU_C_G.1@30.592,43.392 MCU_C_G.1@30.592,43.6 30.592,44 ; MCU_C_R.1@30.592,44.4 30.592,44 ; MCU_C_G.1@30.6,43.5 30.6,43 ; v1(30.6,45.3) 30.6,44 30.592,44 ; MCU_C_H.1@31.5,42.4 31.5,42.5 31,43 30.6,43 ; v1(31.6,38.6) 32.4,38.6 32.908,39.108 MCU_R_C.1@33.4,39.108 ; v1(34.2,45.2) 34.2,45.9 34.7,46.4 35.1,46.4 ; MCU_C_C.2@35.092,45.7 35.1,45.708 35.1,46.4 ; v1@37.6,35.3 37.6,34.5 38.2,33.9 MCU_U_A.18@38.2,33.45 ; MCU_U_A.63@38.2,44.85 38.2,45.7 37.5,46.4 35.1,46.4 ; MCU_U_B.47@39.15,43.375 39.15,42.5 v1(39.9,42.5) 40.65,42.5 MCU_U_B.44@40.65,43.2 ; v1(40.5,38.4) v1@40.3,38.4 ; v1@43.8,29.8 MCU_C_M.2@44.392,29.8 MCU_C_M.2@44.492,29.8 ; MCU_U_B.35@45.575,41.45 45.95,41.45 46.3,41.8 46.3,42.4 ; MCU_U_B.35@45.6,41.5 43.8,41.5 v1(42.3,40) 40.5,38.2 v1@40.3,38.4 ; 46.2,33.3 47.6,33.3 MCU_C_D.2@47.6,31.6 ; v1(46.2,46.2) MCU_C_A.2@46.2,46.9 ; MCU_C_L.1@47.1,49.4 47.1,49.5 MCU_C_L.1@47.3,49.7 ; v1(47.3,49.4) MCU_U_C.1@49.2,49.4 ; v1@47.4,31.2 47.608,31.408 MCU_C_D.2@47.608,31.6 ; MCU_R_J.2@47.608,29.8 48.3,29.8 48.5,30 ; v1(48.1,45.4) 48.1,45.008 MCU_C_E.2@48.3,44.808 ; MCU_U_D.0@50.4,32.3 50.479,32.221 MCU_U_D.8@51.725,32.221 MCU_U_D.8@51.915,32.221 ; MCU_U_D.0@50.5,32.8 50.579,32.721 MCU_U_D.9@51.725,32.721 ; MCU_R_I.2@52.4,34.692 52.4,34.792 52.4,34.9 53,34.9 53,37.7 v1(52.9,37.7) 52.5,37.7 MCU_C_N.2@52.4,37.8 ; MCU_C_N.2@52.4,37.7 MCU_C_N.2@52.4,37.8 ; MCU_C_K.2@53.6,29.3 MCU_C_K.2@53.6,29.4 ; MCU_C_K.2@53.608,29.2 55.5,29.2 MCU_D_C.2@55.6,29.3 ; MCU_C_K.2@53.608,29.4 MCU_C_K.2@53.6,29.4 ; v1(53.9,33.4) 53.5,33 53.5,31.2 53.3,31 53.3,29.9 53.6,29.6 MCU_C_K.2@53.6,29.4 ; MCU_C_I.2@54.8,36.692 v1@55.608,36.692 ; v1(55.6,36.7) v1@55.608,36.692 ; v1@55.7,36.7 55.692,36.692 v1@55.608,36.692 ; MCU_J_B.0@56.7,35.3 56.803,35.403 MCU_J_B.A1_B12@56.803,36.4 ; MCU_J_B.A1_B12@56.7,36.4 55.9,36.4 v1@55.608,36.692 ; 29,38.7 29,41.8 30.2,43 30.6,43 ; v1(39.4,37.1) v1(39.4,38.4) v1@40.3,38.4 ; v1(39.4,37.1) 39.4,36.9 39.5,37 v1(39.4,37.1) ; MCU_C_N.2@52.4,37.8 52.396,37.804 52.4,37.808 MCU_C_N.2@52.4,37.8
  Top Layer w0.3: MCU_J_B.0@56.7,43.6 56.803,43.497 MCU_J_B.A12_B1@56.803,42.6
  Bottom Layer w0.15: v1(39.4,38.4) v1(40.5,38.4) 40.5,38.3 40.3,38.1 ; v1@47.3,49.5 v1(47.3,49.4) 47.3,48.5 51.3,44.5 51.3,42.5 51.95,41.85 51.95,40.4 52.4,39.664 52.4,38.2 v1(52.9,37.7) ; v1(50.5,33.1) 52.3,31.3 v1@52.3,30.9
  Bottom Layer w0.2: MCU_J_A.8@19.727,32 20.397,32 ; MCU_J_A.10@19.727,32.5 20.397,32.5 ; MCU_J_A.2@19.827,30.5 20.497,30.5 ; MCU_J_A.4@19.827,31 20.497,31 ; MCU_J_A.6@19.827,31.5 20.497,31.5 ; v1@25.4,35.4 25.6,35.6 v1(27.2,35.6) ; v1(30.4,38.7) 31.5,38.7 v1(31.6,38.6) ; v1(30.6,45.3) 34.1,45.3 v1(34.2,45.2) ; v1(37.6,35.5) 37.6,36.7 ; v1@40,42.6 v1(39.9,42.5) 40.5,41.9 v1(40.5,38.4) ; v1(46.2,46.2) 46.2,46.1 46.3,46.2 47.3,46.2 v1(48.1,45.4) 49.4,44.1 ; v1(53.1,34.9) 53.1,34.5 53.9,33.7 v1(53.9,33.4)
  other v1: 49.9,29.6 50.8,29.6 43.7,29.8 52.2,30 52.2,30.9 47.4,31 46.3,42.7 46.685,44.273 55.8,47.2 45,47.9 50.7,49.4
MCU_NRST: MCU_C_R.2 MCU_J_A.55 MCU_U_A.7 MCU_U_B.7 | length 26.3
  Top Layer w0.15: MCU_U_A.7@36.1,39.9 MCU_U_B.7@36.85,38.95
  Top Layer w0.2: MCU_J_A.55@19.2,43.7 22.5,43.7 v1@23.5,42.7 ; MCU_C_R.2@31.708,44.5 32,44.5 32.3,44.2 32.3,43.1 32.9,42.5 v1(32.9,41.4) ; v1(34.2,39.9) MCU_U_A.7@35.7,39.9
  Bottom Layer w0.2: v1(23.6,42.6) 23.8,42.8 31.5,42.8 v1(32.9,41.4) 33.4,40.9 35.3,40.9 35.6,40.6 35.6,40.1 35.4,39.9 v1(34.2,39.9) v1@34.1,39.9
MCU_PA0: MCU_J_A.42 MCU_LED_R_Y.1 MCU_U_A.14 MCU_U_B.10 | length 22.5
  Top Layer w0.15: MCU_U_A.14@36.1,36.45 MCU_U_B.10@36.9,37.5
  Top Layer w0.2: MCU_LED_R_Y.1@27,40.4 27,39.2 v1(28.4,37.8) ; v1@34.7,36.4 v1(34.8,36.4) MCU_U_A.14@35.708,36.4 MCU_U_A.14@35.95,36.4
  Bottom Layer w0.2: MCU_J_A.42@19.7,40.5 21.4,40.5 23.9,38 28.9,38 29.9,37 34.2,37 v1(34.8,36.4)
MCU_PA1: MCU_J_A.40 MCU_U_A.15 MCU_U_B.11 | length 19.3
  Top Layer w0.15: MCU_U_A.15@36.1,35.95 MCU_U_B.11@36.9,37
  Top Layer w0.2: v1@34.2,35.9 v1(34.3,35.9) MCU_U_A.15@35.708,35.9 MCU_U_A.15@35.95,35.9
  Bottom Layer w0.2: MCU_J_A.40@19.6,40 21.4,40 23.8,37.6 27.8,37.6 28.8,36.6 33.4,36.6 v1@34.1,35.9
MCU_PA2: MCU_J_A.43 MCU_U_A.16 MCU_U_B.12 | length 21.3
  Top Layer w0.15: MCU_U_A.16@36.1,35.45 MCU_U_B.12@36.9,36.5
  Top Layer w0.2: MCU_J_A.43@19.1,40.7 21.3,40.7 24,38 26.2,38 v1(26.2,36.6) ; v1@34.7,35.4 v1(34.8,35.4) MCU_U_A.16@35.708,35.4 MCU_U_A.16@35.85,35.4
  Bottom Layer w0.2: v1@26.1,36.6 v1(26.2,36.6) 27.5,36.6 28.4,35.7 29.5,35.7 29.8,35.4 v1(34.8,35.4)
MCU_PA3: MCU_J_A.35 MCU_U_A.17 MCU_U_B.13 | length 24.4
  Top Layer w0.2: MCU_J_A.35@19,38.7 20.6,38.7 23.4,35.9 v1(24.7,35.9) ; v1(37,35) 37,34.3 37.7,33.6 MCU_U_A.17@37.7,33.45 ; v1(38.6,35.9) 38.65,35.85 MCU_U_B.13@38.65,35.025
  Bottom Layer w0.2: v1(24.7,35.9) 24.8,35.9 25,36.1 27.4,36.1 28.2,35.3 29.3,35.3 29.7,34.9 36.9,34.9 v1(37,35) 37.8,35 v1@38.6,35.8
MCU_PA4: MCU_J_A.33 MCU_U_A.20 MCU_U_B.14 | length 46.7
  Top Layer w0.15: MCU_J_A.33@19,38.2 20.5,38.2 23.5,35.2 23.5,33.2 24.7,32 32.1,32 32.8,32.7 38.8,32.7 39.2,33.1 MCU_U_A.20@39.2,33.3 ; MCU_U_B.14@39.15,34.7 MCU_U_A.20@39.2,33.45
  Top Layer w0.2: MCU_U_B.14@39.15,35.025 39.15,35.85 40.6,37.3 v1(41.4,37.3)
  Bottom Layer w0.15: v1(41.4,37.3) 44,37.3 44.6,37.9 51.1,37.9 52,37 52,33.8 53.925,31.875
MCU_PA5: MCU_J_A.31 MCU_U_A.21 MCU_U_B.15 | length 47.8
  Top Layer w0.15: MCU_J_A.31@19.1,37.7 20.4,37.7 23.1,35 23.1,33 24.4,31.7 32.2,31.7 32.9,32.4 39.1,32.4 39.7,33 MCU_U_A.21@39.7,33.45 ; MCU_U_B.15@39.65,34.7 MCU_U_A.21@39.7,33.45 ; MCU_U_A.21@39.7,33.55 MCU_U_A.21@39.7,33.45
  Top Layer w0.2: MCU_U_B.15@39.65,35.025 39.65,35.75 40.7,36.8 v1(41.9,36.8)
  Bottom Layer w0.15: v1(41.9,36.8) 44.1,36.8 44.9,37.6 51,37.6 51.7,36.9 51.7,33.7 53.65,31.75 53.65,30.35
MCU_PA6: MCU_J_A.29 MCU_U_A.22 MCU_U_B.16 | length 48.7
  Top Layer w0.15: MCU_J_A.29@18.9,37.2 20.3,37.2 22.7,34.8 22.7,32.803 24.103,31.4 32.3,31.4 33,32.1 39.3,32.1 40.2,33 MCU_U_A.22@40.2,33.45 ; MCU_U_B.16@40.15,34.75 MCU_U_A.22@40.2,33.45 ; MCU_U_A.22@40.2,33.55 MCU_U_A.22@40.2,33.45
  Top Layer w0.2: MCU_U_B.16@40.15,35.025 40.15,35.65 40.8,36.3 v1(41.4,36.3) v1@41.5,36.2
  Bottom Layer w0.15: v1(41.4,36.3) 44.2,36.3 45.2,37.3 50.9,37.3 51.4,36.8 51.4,33.6 53.3,31.7 53.3,30 53.4,29.9 54.1,29.9
MCU_PA7: MCU_J_A.27 MCU_U_A.23 MCU_U_B.17 | length 48.7
  Top Layer w0.15: MCU_J_A.27@18.8,36.7 20.2,36.7 21,35.9 22.3,34.6 22.3,32.7 23.9,31.1 32.4,31.1 33.1,31.8 39.5,31.8 40.7,33 MCU_U_A.23@40.7,33.45 ; MCU_U_B.17@40.65,34.7 MCU_U_A.23@40.7,33.45 ; MCU_U_A.23@40.7,33.55 MCU_U_A.23@40.7,33.45
  Top Layer w0.2: MCU_U_B.17@40.65,35.025 40.65,35.55 40.9,35.8 v1(41.9,35.8)
  Bottom Layer w0.15: v1(41.9,35.8) 44.3,35.8 45.5,37 50.8,37 51.1,36.7 51.1,33.5 53,31.6 53,29.8 53.2,29.6 54.3,29.6